# Altium PCB encoder.PcbDoc
Units mm, origin at the board's own origin, x right, y up, seen from the top; angles counter-clockwise.
Board outline 40.68 x 19.8 mm, 2 copper layers (Top Layer, Bottom Layer); 2 components, 4 nets, 12 pads, 0 vias.
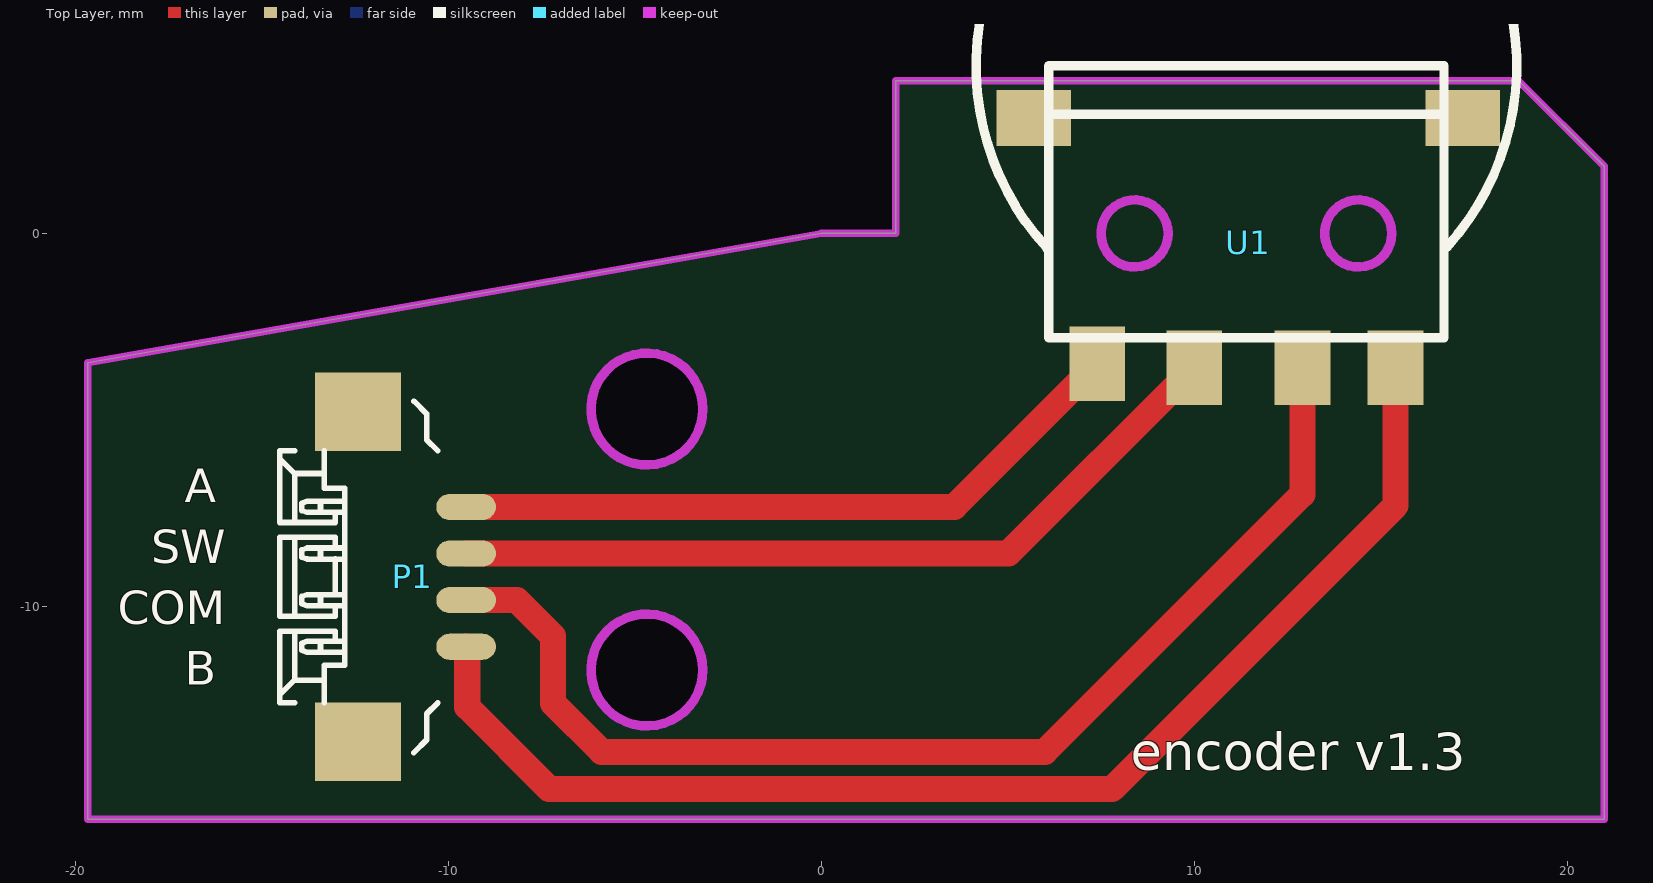
[diagram p0: Top Layer view]
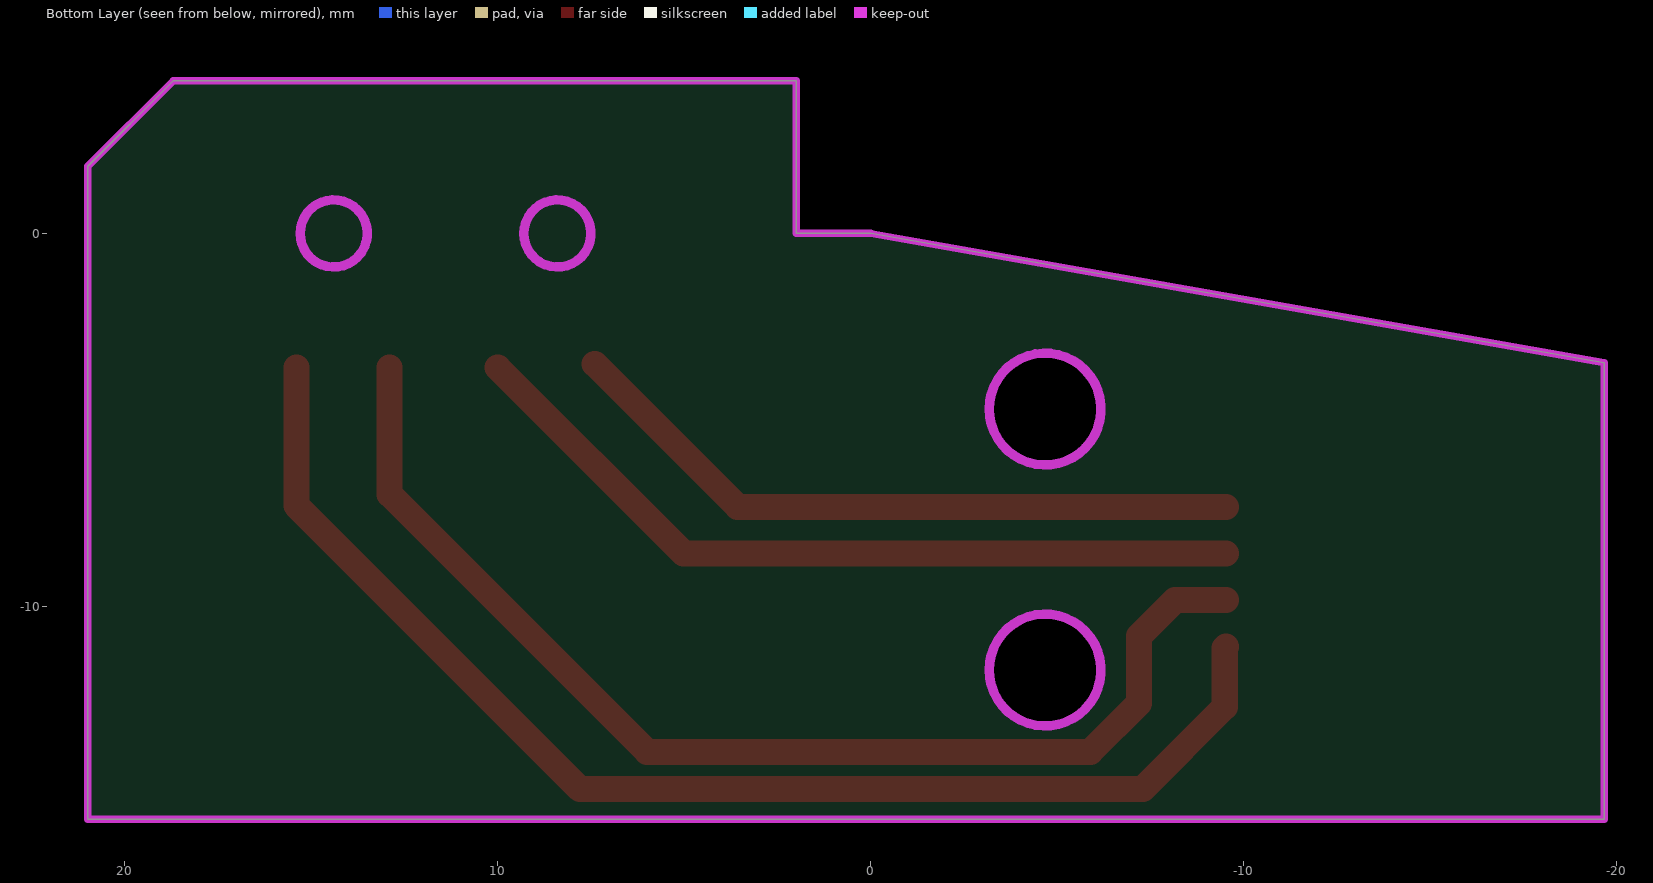
[diagram p1: Bottom Layer view, seen from below]

## Layer stack, top to bottom
Top Layer: signal copper 0.0356
Dielectric: dielectric 0.32, FR-4, Dk 4.8
Bottom Layer: signal copper 0.0356

## Board outline
-19.68,-15.71 -19.68,-3.47 0,0 2,0 2,4.09 18.71,4.09 21,1.8 21,-15.71
cut-out: -6.18,-11.71 ccw(c-4.68,-11.71) -4.68,-13.21 ccw(c-4.68,-11.71) -3.18,-11.71 ccw(c-4.68,-11.71) -4.68,-10.21 ccw(c-4.68,-11.71)
cut-out: -6.18,-4.71 ccw(c-4.68,-4.71) -4.68,-6.21 ccw(c-4.68,-4.71) -3.18,-4.71 ccw(c-4.68,-4.71) -4.68,-3.21 ccw(c-4.68,-4.71)

## Design rules (kind name [scope] priority, off if disabled: settings)
Clearance [All] p1: gap=0.2
ComponentClearance [All] p1 off: gap=0.254 collisioncheckmode=3 verticalgap=0.254 showdistances=FALSE
PolygonConnect [All] p1: connectstyle=Direct reliefconductorwidth=0.254 reliefentries=4 polygonreliefangle="90 Angle"
RoutingVias [All] p1: holewidth=0.3 width=0.6 viastyle="Through Hole" minholewidth=0.3 minwidth=0.6 maxholewidth=0.3 maxwidth=0.6
SilkscreenOverComponentPads [All] p1: minsilkscreentomaskgap=0.254
SolderMaskExpansion [All] p1: expansion=0.102
Width [All] p1: maxlimit=3 minlimit=0.2 preferedwidth=0.2
26 further rules are at their usual default settings.

## Components (designator, comment, footprint, x,y, rotation, side; value= is the part's Value field where it differs from the comment)
P1 "" "MX1.25-4P 卧" -10.98,-9.21 r90 top
U1 "SIQ-02FVS3滚轮编码器" 美上美SIQ-02FVS3滚轮编码器 11.4,4.5 r0 top

## Footprints (in the part's own frame and the unit in brackets; to place one, negate y for a bottom-side part, rotate by r counter-clockwise, add the part's x,y. Pads: shape width x height; smd on the part's side, far side on the other; paste and mask are expansions set on the pad)
"MX1.25-4P 卧" [mm]
  rect 2.1x2.3 smd: 0(-4.425,1.45) 0(4.425,1.45)
  oval 0.7x1.6 smd: 1(1.875,-1.45) 2(0.625,-1.45) 3(-0.625,-1.45) 4(-1.875,-1.45)
  silkscreen extent -4.71,-0.69 4.71,3.55
美上美SIQ-02FVS3滚轮编码器 [mm]
  rect 2x1.5 smd: 0(-5.7,-1.4) 0(5.8,-1.4)
  rect 1.5x2 smd: 1(-4,-8) 2(-1.4,-8.1) 3(1.5,-8.1) 4(4,-8.1)
  Keep-Out Layer circle w0.254: c3,-4.5 r0.9
  Keep-Out Layer circle w0.254: c-3,-4.5 r0.9
  silkscreen extent -7.25,-7.3 7.25,7.25

## Part data
P1: library part "Header 4", "Header, 4-Pin"

## Nets (pads, with @x,y where several pads share a name; then routed paths per layer and width w, separated by ;. In a path a pad name is that pad's centre, name@x,y a point inside that pad or via, vN(x,y) a via of type N, cw(c..) or ccw(c..) an arc to the next point about the centre after c; other vN are vias at no path point)
NetP1_1: P1.1 U1.1 | length 18.5
  Top Layer w0.7: P1.1 3.565,-7.335 U1.1
NetP1_2: P1.2 U1.2 | length 21.6
  Top Layer w0.7: P1.2 5.015,-8.585 U1.2
NetP1_3: P1.3 U1.3 | length 31.4
  Top Layer w0.7: P1.3 -8.165,-9.835 -7.2,-10.8 -7.2,-12.6 -5.894,-13.906 5.994,-13.906 12.9,-7 U1.3
NetP1_4: P1.4 U1.4 | length 34.3
  Top Layer w0.7: P1.4 -9.5,-11.115 -9.5,-12.7 -7.3,-14.9 7.8,-14.9 15.4,-7.3 U1.4
pads on no net: P1.0 U1.0

## Keep-outs
Keep-Out Layer:
  circle w0.254: c-4.68,-11.71 r1.5
  circle w0.254: c-4.68,-4.71 r1.5
  lines w0.2: -19.68,-15.71 -19.68,-3.47 0,0 2,0 2,4.09 18.71,4.09 21,1.8 21,0 21,-15.71 -19.68,-15.71

## Silkscreen, mask and mechanical layers (free items; w line width, h text height)
Top Overlay:
  text "A" at -17.081,-7.21 h0.9
  text "SW" at -17.98,-8.843 h0.9
  text "COM" at -18.88,-10.477 h0.9
  text "B" at -17.081,-12.11 h0.9
  text "encoder v1.3" at 8.3,-14.4 h1